# Altium PCB mainboard.PcbDoc
Units mm, origin at the board's own origin, x right, y up, seen from the top; angles counter-clockwise.
Board outline 85 x 57 mm, 2 copper layers (Top Layer, Bottom Layer); 57 components, 35 nets, 167 pads, 83 vias.
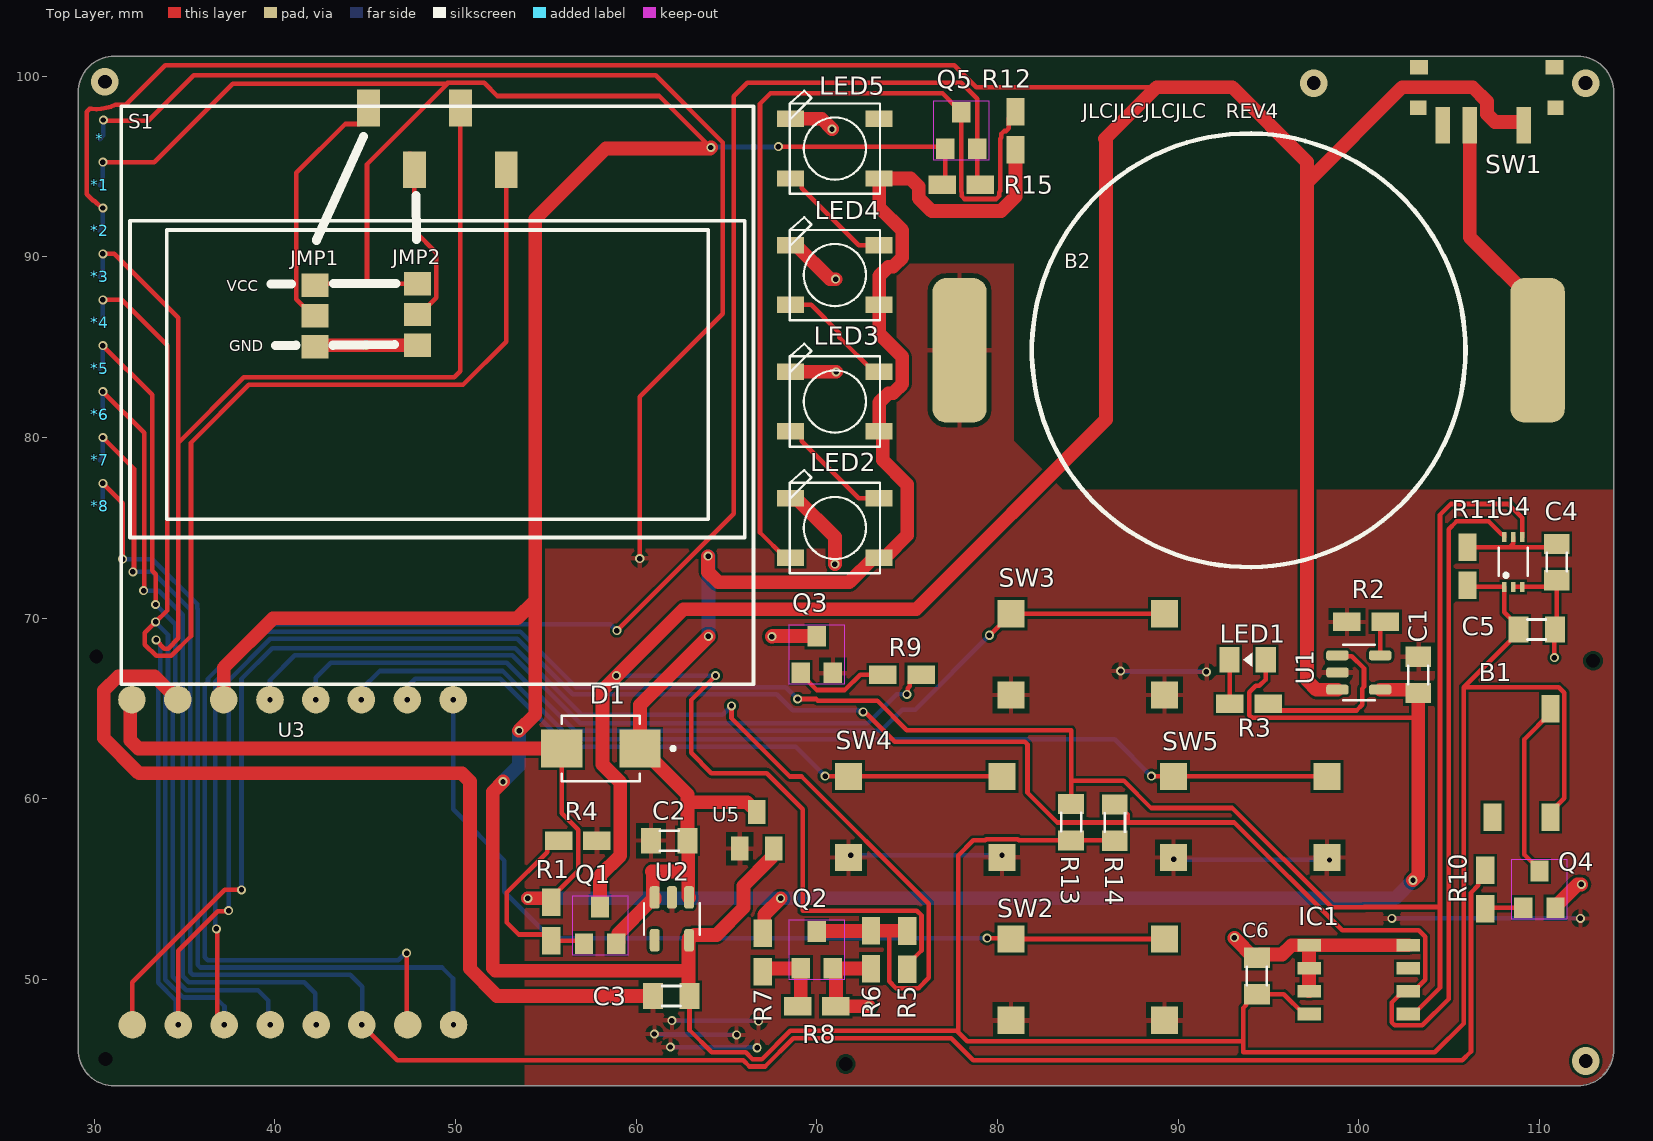
[diagram p0: Top Layer view]
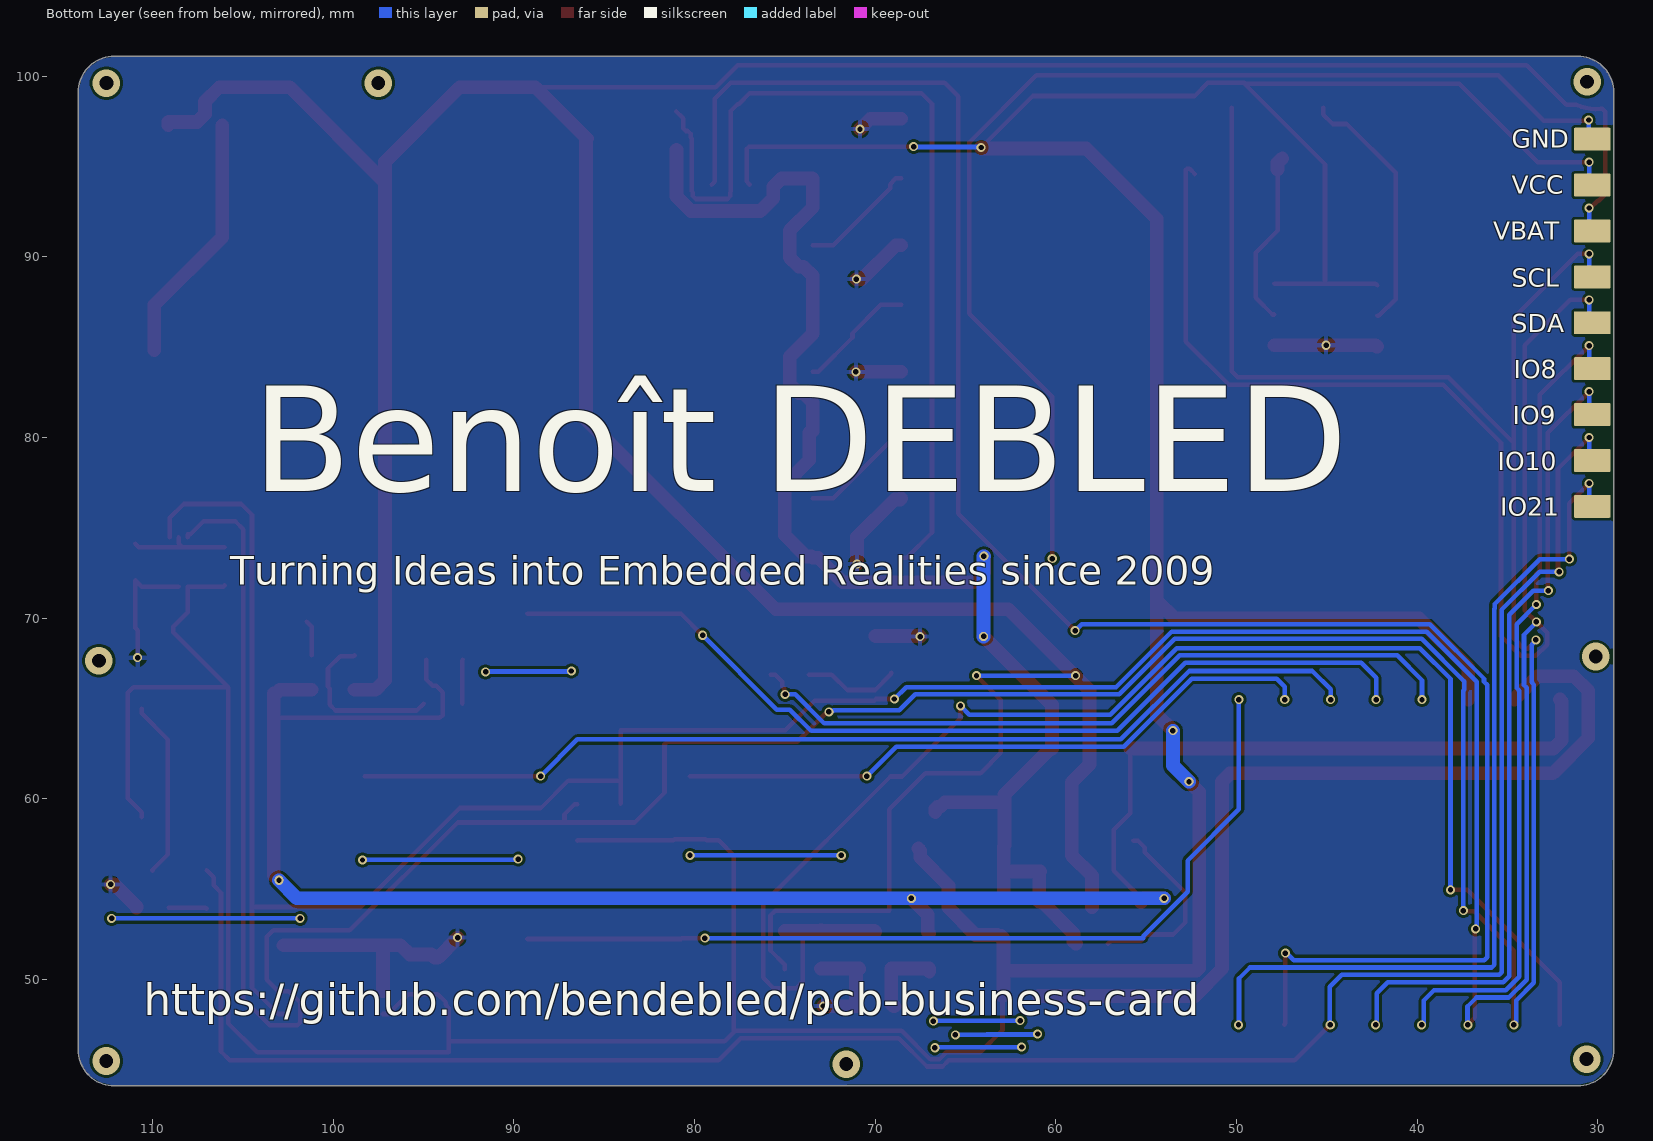
[diagram p1: Bottom Layer view, seen from below]

## Layer stack, top to bottom
Top Solder: solder mask 0.0102, Solder Resist, Dk 3.5
Top Layer: signal copper 0.0356
Dielectric 1: dielectric 0.32, FR-4, Dk 4.8
Bottom Layer: signal copper 0.0356
Bottom Solder: solder mask 0.0102, Solder Resist, Dk 3.5

## Board outline
29.114,46.114 29.114,99.114 cw(c31.114,99.114) 31.114,101.114 112.114,101.114 cw(c112.114,99.114) 114.114,99.114 114.114,46.114 cw(c112.114,46.114) 112.114,44.114 31.114,44.114 cw(c31.114,46.114)

## Design rules (kind name [scope] priority, off if disabled: settings)
Clearance [All] p1: gap=0.152 ignorepadtopadclearanceinfootprint=TRUE except(0.254: Arc-Via Arc-Text Track-Via Track-Text SMDPad-Via SMDPad-Text THPad-THPad THPad-Via THPad-Text Via-Via Via-Text Fill-Text Poly-Text Region-Text Text-Text)
ComponentClearance [All] p1 off: gap=0.254 collisioncheckmode=3 verticalgap=0.254 showdistances=FALSE
HoleSize [All] p1: absolutevalues=TRUE maxlimit=2.54 minlimit=0.3 maxpercent=80.000 minpercent=20.000
MinimumSolderMaskSliver [All] p1: minsoldermaskwidth=0.038
PolygonConnect [All] p1: connectstyle=Relief reliefconductorwidth=0.254 reliefentries=4 polygonreliefangle="90 Angle" airgapwidth=0.254
RoutingVias [All] p1: holewidth=0.3 width=0.5 viastyle="Through Hole" minholewidth=0.3 minwidth=0.5 maxholewidth=0.3 maxwidth=0.5
SilkToSilkClearance [All] p1 off: silktosilkclearance=0.254
SilkToSolderMaskClearance [IsPad] p1 off: minsilkscreentomaskgap=0.254 clearancetoexposedcopper=TRUE
SolderMaskExpansion [All] p1: expansion=0.102 istentingtop=FALSE
Width [All] p1: maxlimit=0.762 minlimit=0.254 preferedwidth=0.254
25 further rules are at their usual default settings.

## Components (designator, comment, footprint, x,y, rotation, side; value= is the part's Value field where it differs from the comment)
* "PAD 1" PAD_50mil_x_80mil 30.48,96.52 r180 top
*1 "PAD 1" PAD_50mil_x_80mil 30.48,93.98 r180 top
*2 "PAD 1" PAD_50mil_x_80mil 30.48,91.44 r180 top
*3 "PAD 1" PAD_50mil_x_80mil 30.48,88.9 r180 top
*4 "PAD 1" PAD_50mil_x_80mil 30.48,86.36 r180 top
*5 "PAD 1" PAD_50mil_x_80mil 30.48,83.82 r180 top
*6 "PAD 1" PAD_50mil_x_80mil 30.48,81.28 r180 top
*7 "PAD 1" PAD_50mil_x_80mil 30.48,78.74 r180 top
*8 "PAD 1" PAD_50mil_x_80mil 30.48,76.2 r180 top
B1 "Buzzer5x5x2" BUZZER_5x5x2 109,62 r0 top
B2 "LIR2450" LIR2450 93.904,84.836 r180 top
C1 "1uF" C0805K 103.296,66.857 r90 top
C2 "10uF" C0805K 61.833,57.695 r180 top
C3 "10uF" C0805K 61.951,49.098 r180 top
C4 "100nF" C0805K 110.95,73.119 r270 top
C5 "100nF" C0805K 109.846,69.378 r0 top
C6 "1uF" C0805K 94.361,50.19 r90 top
D1 "Diode_M7" DO-214 58.042,62.791 r180 top
IC1 "DS1621_1" SOP-8 100,50 r180 top
JMP1 "0R-JUMPA" A0R-JMP 42.215,86.741 r0 top
JMP2 "0R-JUMPA" A0R-JMP 47.904,86.817 r0 top
LED1 "LED" LED0805K 93.85,67.703 r180 top
LED2 "WS2812B" WS2812B 71,75 r0 top
LED3 "WS2812B" WS2812B 71,82 r0 top
LED4 "WS2812B" WS2812B 71,89 r0 top
LED5 "WS2812B" WS2812B 71,96 r0 top
Q1 "SI2301" SOT-23 58,53 r0 top value=IRLZ44NPBF
Q2 "SI2302" SOT-23 70,51.651 r0 top value=IRLZ44NPBF
Q3 "SI2302" SOT-23 70,68 r0 top value=IRLZ44NPBF
Q4 "SI2302" SOT-23 110,55 r0 top value=IRLZ44NPBF
Q5 "BSS138" SOT-23 78,97 r0 top value=IRLZ44NPBF
R1 "1k" R0805W 55.291,53.212 r90 top
R2 "10k" R0805W 100.392,69.804 r0 top
R3 "470" R0805W 93.918,65.279 r0 top
R4 "100k" R0805W 56.76,57.695 r0 top
R5 "4.7M" R0805W 75.006,51.638 r270 top
R6 "1M" R0805W 73,51.651 r90 top
R7 "1k" R0805W 67,51.5 r90 top
R8 "100k" R0805W 70.003,48.528 r180 top
R9 "1k" R0805W 74.727,66.878 r180 top
R10 "1k" R0805W 107,55 r270 top
R11 "1k" R0805W 106.016,72.884 r270 top
R12 "10k" R0805W 81,97 r270 top
R13 "4.7k" R0805K 84.074,58.725 r270 top
R14 "4.7k" R0805K 86.493,58.699 r270 top
R15 "10k" R0805W 78,94 r180 top
S1 "1.3\" OLED NO_HOLES_SMD" 1.3_NO-holes_SMD 48.997,82.347 r0 top
SW1 "MSK-12C02" MSK-12C02 107.086,99.39 r180 top
SW2 "10-XX-6MD" BT6X6 85,50 r180 top
SW3 "10-XX-6MD" BT6X6 85,68 r180 top
SW4 "10-XX-6MD" BT6X6 76,59 r180 top
SW5 "10-XX-6MD" BT6X6 94,59 r180 top
U1 "LTC4054" SOT23-5 100,67 r0 top
U2 "HT7833" SOT23-5 61.976,53.365 r270 top
U3 "ESP32C3" ESP32-C3-module 41,56.5 r90 top
U4 "BH1750" XDCR_BH1750FVI-TR 108.55,73.119 r90 top
U5 "Alternate LDO (SOT23)" SOT95P237X112-3N 66.675,58.268 r0 top

## Footprints (in the part's own frame and the unit in brackets; to place one, negate y for a bottom-side part, rotate by r counter-clockwise, add the part's x,y. Pads: shape width x height; smd on the part's side, far side on the other; paste and mask are expansions set on the pad)
1.3_NO-holes_SMD [mil]
  rect 50x80 / inner round 60 / far side round 0 all layers, no hole: 0(-150,626.21) 1(-50,491.22) 2(50,626.21) 3(150,491.22)
  silkscreen extent -689,-630 689,630
A0R-JMP [mm]
  rect 1.5x1.3 smd: 1(0,1.7) 2(0,0) 3(0,-1.7)
BT6X6 [mm]
  rect 1.5x1.5 smd: P(-4.25,2.25) P1(4.25,2.25) S(-4.25,-2.25) S1(4.25,-2.25)
BUZZER_5x5x2 [mm]
  rect 1x1.524 / inner round 1.524 / far side round 0 all layers, no hole: +(1.6,-3) -(1.6,3) NC(-1.6,-3)
C0805K [mil]
  rect 44x56 smd: 1(-39.37,0) 2(40,0)
  silkscreen extent -20,-22 20,22
DO-214 [mm]
  rect 2.28x2.12 smd: A(2.165,0) C(-2.165,0)
  silkscreen extent -4.1,-1.81 2.16,1.81
ESP32-C3-module [mil]
  round 60 / inner round 60 / far side round 0 all layers, no hole: 1(354.33,350.88) 2(354.33,250.88) 3(354.33,150.88) 4(354.33,50) 5(354.33,-50) 6(354.33,-149.12) 7(354.33,-249.12) 8(354.33,-349.12) 9(-354.33,350) 10(-354.33,250) 11(-354.33,150) 12(-354.33,49.12) 13(-354.33,-50.88) 14(-354.33,-150) 15(-354.33,-250) 16(-354.33,-350)
LED0805K [mil]
  rect 44x56 smd: 1(-39.37,0) 2(40,0)
  silkscreen extent -10,-15 10,15
LIR2450 [mm]
  rrect50% 3x8 / inner rrect50% 3x8 / far side rrect50% 0x0 all layers, no hole: 1(-16,0) 2(16,0)
  silkscreen extent -12,-12 12,12
MSK-12C02 [mil]
  rect 31.5x78.74 smd: COM(37.4,82.68) L1(96.46,82.68) L2(-80.71,82.68)
  rect 39.37x31.5 smd: GND@1(-147.64,-44.29) GND@4(147.64,-44.29)
  rect 35.43x31.5 smd: GND@2(-149.61,44.29) GND@3(149.61,44.29)
PAD_50mil_x_80mil [mil]
  rrect10% 0x0 / inner rrect50% 60x60 / far side rrect10% 80x50 all layers, no hole mask+4: 1(7,0)
R0805K [mil]
  rect 44x56 smd: 1(-39.37,0) 2(40,0)
  silkscreen extent -20,-22 20,22
R0805W [mil]
  rect 60x40 smd: 1(-41.44,0) 2(42,0)
SOP-8 [mm]
  rect 1.3x0.7 smd: 1(-2.75,1.905) 2(-2.75,0.635) 3(-2.75,-0.635) 4(-2.75,-1.905) 5(2.75,-1.905) 6(2.75,-0.635) 7(2.75,0.635) 8(2.75,1.905)
SOT23-5 [mm]
  rrect50% 1.24x0.55 smd: 1(-1.185,0.95) 2(-1.185,0) 3(-1.185,-0.95) 4(1.185,-0.95) 5(1.185,0.95)
  silkscreen extent -0.88,-1.54 0.88,1.54
SOT95P237X112-3N [mil]
  rect 39x52 smd: 1(-37,-40) 2(37,-40) 3(0,40)
SOT-23 [mil]
  rect 40x45 smd: 1(-35,-40) 2(35,-40) 3(0,40)
  Top Layer keep-out region: -60,-65 -60,65 60,65 60,-65
WS2812B [mm]
  rect 1.5x0.9 smd: 1-VDD(2.45,-1.65) 2-DOUT(2.45,1.65) 3-GND(-2.45,1.65) 4-DIN(-2.45,-1.65)
  silkscreen extent -2.5,-2.5 2.5,3.2
XDCR_BH1750FVI-TR [mm]
  rect 0.55x0.25 smd: 1(-1.375,0.5) 2(-1.375,0) 3(-1.375,-0.5) 4(1.375,-0.5) 5(1.375,0) 6(1.375,0.5)
  silkscreen extent -0.84,-0.8 0.78,0.8, body extent -1.5,-0.8 1.5,0.8, height 0.75

## Part data
C1 C2 C3 C4 C5 C6: library part C-USC0805K
IC1: Package=SOP-8, DeviceSetName=TP4056, GateName_1=G$1, LibraryName=bd-component, SymbolName_1=TP4056
JMP1 JMP2: Package=A0R-JMP, DeviceName=A, DeviceSetName=0R-JUMP, GateName_1=-0R, GateName_2=G$2, LibraryName=bd-misc, SymbolName_1=0RJM, SymbolName_2=JMP
LED2 LED3 LED4 LED5: "Raspberry Pi HAT _40 pin_ Wheeled Robotics Kit", Package=None, Availability=Unavailable, MF="SparkFun Electronics", MP=WS2812B, Price=None, SnapEDA_Link=https://www.snapeda.com/parts/WS2812B/Worldsemi/view-part/1038297/?ref=snap
Q1 Q2 Q3 Q4: Manufacturer_Part_Number=IRLZ44NPBF, Built_By=EMA_UL_Team, C="Copyright (C) 2018 Accelerated Designs. All rights reserved", Copyright="Copyright (C) 2018 Accelerated Designs. All rights reserved", Vendor=Infineon
Q5: library part SI2302, Manufacturer_Part_Number=IRLZ44NPBF, Built_By=EMA_UL_Team, C="Copyright (C) 2018 Accelerated Designs. All rights reserved", Copyright="Copyright (C) 2018 Accelerated Designs. All rights reserved", Vendor=Infineon
R1 R2 R3 R4 R5 R6 R7 R8 R9 R10 R11 R12 R15: library part R-US_R0805W
R13 R14: library part R-US_R0805
SW2 SW3 SW4 SW5: Package=BT4.5X4.5, DeviceName=-4.5SMD, DeviceSetName=10-XX, GateName_1=1, LibraryName=bd-switch, SymbolName_1=TS2
U1: "Battery Charger Li-Ion 10mA to 150mA 4.2V 5-Pin TSOT-23 T/R", Package="SOT-23-5 Analog Devices", Digi-Key_Part_Number=LTC4054LES5-4.2#TRPBFCT-ND, Digi-Key_Purchase_URL=https://www.digikey.com/product-detail/en/linear-technology-analog-devices/LTC4054LES5-4.2-TRPBF/LTC4054LES5-4.2-TRPBFCT-ND/1888452?utm_source=snapeda&utm_medium=aggregator&utm_campaign=symbol, MF="Analog Devices", MP=LTC4054LES5-4.2#TRPBF, SnapEDA_Link=https://www.snapeda.com/parts/LTC4054LES5-4.2%23TRPBF/Analog%20Devices/view-part/4339236/?ref=snap
U2: library part HT7833-MIC5216, "LDO Regulator", Package="SOT-23-5 Analog Devices", Digi-Key_Part_Number=LTC4054LES5-4.2#TRPBFCT-ND, Digi-Key_Purchase_URL=https://www.digikey.com/product-detail/en/linear-technology-analog-devices/LTC4054LES5-4.2-TRPBF/LTC4054LES5-4.2-TRPBFCT-ND/1888452?utm_source=snapeda&utm_medium=aggregator&utm_campaign=symbol, MF="Analog Devices", MP=LTC4054LES5-4.2#TRPBF, SnapEDA_Link=https://www.snapeda.com/parts/LTC4054LES5-4.2%23TRPBF/Analog%20Devices/view-part/4339236/?ref=snap
U4: "Optical Sensor Ambient 560nm IÂ²C 6-SMD, Flat Lead Exposed Pad", Package="SMD-6 ROHM Semiconductor", Availability="In Stock", Check_prices=https://www.snapeda.com/parts/BH1750FVI-TR/Rohm/view-part/?ref=eda, MF=Rohm, MP=BH1750FVI-TR, Price=None, Purchase-URL=https://pricing.snapeda.com/search/part/BH1750FVI-TR/?ref=eda, SnapEDA_Link=https://www.snapeda.com/parts/BH1750FVI-TR/Rohm/view-part/?ref=snap
U5: library part MCP1700T-3302E/TT, Package=SOT95P237X112-3N, DeviceSetName=MCP1700T-3302E/TT, GateName_1=A, LibraryName=bd-component, MPN=MCP1700T-3302E/TT, OC_FARNELL=1296592, OC_NEWARK=88H9817, SUPPLIER=Microchip, SymbolName_1=MCP1700T-3302E/TT
SW1: DeviceSetName=MSK-12C02, GateName_1=MSK-12C02, LibraryName=bd-switch, Package=MSK-12C02, SymbolName_1=SPDT_SWITCH

## Via types
v1: diameter 0.5, hole 0.3, Top Layer to Bottom Layer, tented both sides, 75 vias
v2: diameter 1.524, hole 0.762, Top Layer to Bottom Layer, 4 vias
v3: diameter 0/1.524 (per signal layer), hole 0.762, Top Layer to Bottom Layer, 4 vias

## Nets (pads, with @x,y where several pads share a name; then routed paths per layer and width w, separated by ;. In a path a pad name is that pad's centre, name@x,y a point inside that pad or via, vN(x,y) a via of type N, cw(c..) or ccw(c..) an arc to the next point about the centre after c; other vN are vias at no path point)
BAT_VOLTAGE: Q2.3 R5.1 R6.2 U3.9 | length 82.1
  Top Layer w0.254: U3.9 32.11,49.86 37.215,54.966 v1(38.151,54.966) ; v1(65.278,65.155) 65.278,64.465 68.498,61.246 69.15,61.246 76.2,54.195 76.2,50.1 75.63,49.53 74.382,49.53 74.003,49.909 74.003,52.704
  Top Layer w0.762: Q2.3 70.025,52.692 72.975,52.692 R6.2 73.013,52.704 74.003,52.704 74.993,52.704 R5.1
  Bottom Layer w0.254: v1(38.151,54.966) 38.151,66.65 39.853,68.351 53.315,68.351 56.998,64.668 64.791,64.668 v1(65.278,65.155)
BTN0: SW2.S SW2.S1 U3.8 | length 49.5
  Top Layer w0.254: v1(79.426,52.299) 80.701,52.299 SW2.S1 SW2.S
  Bottom Layer w0.254: v1(49.868,65.5) 49.868,59.428 52.705,56.591 52.705,54.861 55.166,52.4 55.166,52.299 v1(79.426,52.299)
BTN1: SW4.S SW4.S1 U3.7 | length 36
  Top Layer w0.254: v1(70.46,61.265) 71.735,61.265 SW4.S1 SW4.S
  Bottom Layer w0.254: v1(47.328,65.5) 47.328,66.205 47.772,66.65 52.477,66.65 56.236,62.89 68.834,62.89 v1(70.46,61.265)
BTN2: SW5.S SW5.S1 U3.6 | length 56.9
  Top Layer w0.254: v1(88.519,61.265) 89.735,61.265 SW5.S1 SW5.S
  Bottom Layer w0.254: v1(44.788,65.5) 44.788,66.073 45.796,67.081 52.62,67.081 56.405,63.297 86.487,63.297 v1(88.519,61.265)
BTN3: SW3.S SW3.S1 U3.5 | length 52.8
  Top Layer w0.254: v1(79.553,69.063) 79.563,69.063 SW3.S1 SW3.S
  Bottom Layer w0.254: v1(42.27,65.5) 42.27,66.705 43.104,67.539 52.837,67.539 56.597,63.779 73.549,63.779 74.717,64.948 75.448,64.948 79.553,69.053 v1(79.553,69.063)
BUZZER: *7.1 R10.1 U3.14 | length 119.7
  Top Layer w0.254: v1(30.48,80.01) 32.203,78.287 32.203,72.703 32.135,72.634 v1(32.135,72.568) ; v1(44.81,47.5) 46.768,45.542 65.919,45.542 66.271,45.191 67.13,45.191 68.701,46.761 77.432,46.761 78.651,45.542 105.734,45.542 106.213,46.021 106.213,54.811 106.619,55.217 106.619,55.671 R10.1
  Bottom Layer w0.254: *7.1 30.48,78.918 v1(30.48,80.01) ; v1(32.135,72.568) 33.223,72.568 35.306,70.485 35.306,70.374 35.314,70.366 35.314,50.415 35.462,50.267 44.171,50.267 44.831,49.606 44.831,47.521 v1(44.81,47.5)
COMPONENTS_ON_OFF: R9.1 U3.4 | length 40.7
  Top Layer w0.254: v1(74.981,65.786) 75.028,65.833 75.028,66.127 75.144,66.243 75.144,66.497 75.525,66.878 R9.1
  Bottom Layer w0.254: v1(39.73,65.5) 39.73,66.578 41.097,67.945 53.137,67.945 56.896,64.186 72.829,64.186 74.429,65.786 v1(74.981,65.786)
GND: *.1 B2.2 C1.2 C2.2 C3.2 Q3.2 R2.1 R4.2 SW2.P SW2.P1 SW3.P SW3.P1 SW4.P SW4.P1 SW5.P SW5.P1 U1.2 U2.2 U3.2 U5.1 | length 159.7
  Top Layer w0.254: v1(30.506,97.585) 30.552,97.54 32.999,97.54 35.509,100.051 61.081,100.051 64.795,96.336 64.795,86.86 60.196,82.261 60.196,73.306 v1(60.198,73.304) ; SW4.P1 v1(71.877,56.877) ; SW5.P1 89.75,56.681 v1(89.764,56.667) ; v1@101.829,53.34 v1(101.829,53.391)
  Top Layer w0.762: U3.2 33.332,66.795 31.328,66.795 30.531,65.998 30.531,63.373 32.487,61.417 50.354,61.417 50.8,60.971 50.8,50.6 52.302,49.098 C3.2
  Bottom Layer w0.254: *.1 30.506,96.724 v1(30.506,97.585) ; v1(61.011,46.99) 61.036,46.965 63.818,46.965 63.843,46.939 v1(65.557,46.939) ; v1(61.891,46.27) 61.912,46.249 66.679,46.249 v1(66.7,46.228) ; v1(61.976,47.727) 61.989,47.714 66.764,47.714 v1(66.777,47.701) ; v1(71.877,56.877) v1(80.25,56.877) ; v1(86.817,67.081) 86.843,67.056 91.542,67.056 v1(91.567,67.031) ; v1(89.764,56.667) 89.786,56.645 98.355,56.645 v1(98.377,56.623) ; v1(101.829,53.391) v1(112.268,53.391)
GND_ON_OFF: C4.2 C5.2 C6.2 IC1.4 IC1.5 IC1.6 IC1.7 JMP1.3 JMP2.3 LED2.3-GND LED3.3-GND LED4.3-GND LED5.3-GND Q2.2 Q3.3 Q4.2 R6.1 R8.1 U4.2 U4.3 | length 49.3
  Top Layer w0.254: U4.2 U4.3 110.591,71.744 C4.2 110.95,69.466 C5.2 110.82,69.336 v1(110.82,67.818)
  Top Layer w0.762: JMP1.3 42.289,85.115 v1(45.034,85.115) 47.903,85.115 JMP2.3 ; v1(67.513,68.986) 67.543,69.016 Q3.3 ; LED2.3-GND 68.619,76.581 68.919,76.581 71,74.5 v1(71,73) ; LED3.3-GND 71.061,83.65 v1(71.069,83.642) ; LED4.3-GND 68.85,90.65 70.727,88.773 v1(71.044,88.773) ; LED5.3-GND 70.269,97.65 v1(70.841,97.079) ; v1(72.873,48.539) 72.862,48.528 R8.1 71.055,50.405 70.889,50.571 Q2.2 70.907,50.616 72.982,50.616 R6.1 ; v1(93.116,52.324) 93.116,52.299 94.209,51.206 C6.2 94.539,51.384 95.758,51.384 96.279,51.905 IC1.5 ; IC1.7 IC1.6 IC1.5 ; IC1.4 IC1.5 ; Q4.2 110.889,54.047 112.112,55.27 v1(112.319,55.27)
IO8: *5.1 U3.12 | length 45.2
  Top Layer w0.254: v1(30.48,85.09) 33.202,82.368 33.202,72.64 33.405,72.437 v1(33.405,70.764)
  Bottom Layer w0.254: *5.1 30.48,83.998 v1(30.48,85.09) ; v1(33.405,70.764) 34.493,69.676 34.493,66.142 34.348,65.997 34.348,50.164 35.093,49.419 36.881,49.419 36.897,49.403 39.065,49.403 39.624,48.844 39.624,47.628 v1(39.752,47.5)
IO9: *6.1 U3.13 | length 45.5
  Top Layer w0.254: v1(30.48,82.55) 32.766,80.264 32.766,71.558 v1(32.741,71.532)
  Bottom Layer w0.254: *6.1 30.48,81.458 v1(30.48,82.55) ; v1(32.741,71.532) 33.573,71.532 34.907,70.198 34.907,50.18 35.228,49.859 41.632,49.859 42.24,49.251 42.24,47.552 v1(42.292,47.5)
IO21: *8.1 U3.16 | length 48.2
  Top Layer w0.254: v1(30.48,77.47) 31.572,76.378 v1(31.572,73.279)
  Bottom Layer w0.254: *8.1 30.48,76.378 v1(30.48,77.47) ; v1(31.572,73.279) 33.223,73.279 35.712,70.79 35.712,70.542 35.72,70.535 35.72,50.822 35.869,50.673 49.251,50.673 49.86,50.063 49.86,47.53 v1(49.89,47.5)
NetB1_-: B1.- Q4.3 | length 9.9
  Top Layer w0.254: Q4.3 110,56.079 109.169,56.91 109.169,63.307 110.6,64.738 B1.-
NetB2_1: B2.1 SW1.COM | length 14
  Top Layer w0.762: SW1.COM 106.136,91.103 109.904,87.336 B2.1
NetC4_1: C4.1 R11.1 U4.5 | length 5.6
  Top Layer w0.254: R11.1 108.354,73.937 ; U4.5 108.548,74.492 108.548,74.131 108.354,73.937 ; C4.1 110.768,73.937 108.354,73.937
NetLED1_2: LED1.2 R3.1 | length 2.4
  Top Layer w0.254: LED1.2 92.866,67.671 R3.1
NetLED2_2-DOUT: LED2.2-DOUT LED3.4-DIN | length 6.6
  Top Layer w0.254: LED3.4-DIN 68.85,80.35 69.173,80.027 69.173,79.796 72.319,76.65 LED2.2-DOUT
NetLED2_4-DIN: LED2.4-DIN Q5.3 R12.1 | length 49.8
  Top Layer w0.254: LED2.4-DIN 68.25,73.35 66.853,74.747 66.853,98.476 67.437,99.06 76.956,99.06 77.555,98.46 77.619,98.46 78,98.079 Q5.3 78,93.603 78.011,93.592 78.011,93.376 78.175,93.213 79.93,93.213 80.094,93.376 80.094,93.592 80.153,93.651 80.153,96.536 80.213,96.595 80.213,96.811 80.376,96.975 80.48,96.975 80.628,97.123 80.628,97.681 R12.1
NetLED3_2-DOUT: LED3.2-DOUT LED4.4-DIN | length 6.6
  Top Layer w0.254: LED4.4-DIN 69.681,87.35 71.254,85.777 71.254,85.546 73.15,83.65 LED3.2-DOUT
NetLED4_2-DOUT: LED4.2-DOUT LED5.4-DIN | length 6.6
  Top Layer w0.254: LED5.4-DIN 68.85,94.35 69.173,94.027 69.173,93.796 72.319,90.65 LED4.2-DOUT
NetQ1_1: Q1.1 R1.1 R4.1 | length 10.6
  Top Layer w0.254: R4.1 55.453,57.695 55.072,57.314 55.072,57.06 52.837,54.824 52.837,53.163 53.5,52.5 54.951,52.5 R1.1 56.936,52.159 Q1.1
NetQ2_1: Q2.1 R7.1 R8.2 | length 4.5
  Top Layer w0.762: R7.1 67,50.616 68.984,50.616 69.002,50.635 Q2.1 69.111,48.655 68.984,48.528 R8.2
NetQ3_1: Q3.1 R9.2 | length 5.3
  Top Layer w0.254: Q3.1 69.111,66.921 70,66.032 71.555,66.032 72.402,66.878 R9.2
NetQ4_1: Q4.1 R10.2 | length 2.1
  Top Layer w0.254: R10.2 107.051,53.984 Q4.1
NetR2_2: R2.2 U1.5 | length 2
  Top Layer w0.254: U1.5 101.185,69.531 R2.2
NetR3_2: R3.2 U1.1 | length 9.3
  Top Layer w0.254: R3.2 95.366,64.898 99.874,64.898 100.188,65.212 100.188,65.423 100.18,65.431 100.18,66.112 100.286,66.218 100.286,67.227 99.612,67.901 98.864,67.901 U1.1
OLED_GND: JMP2.2 S1.1 | length 9.7
  Top Layer w0.254: S1.1 47.727,91.444 48.934,90.237 48.934,87.747 48.004,86.817 JMP2.2
  Top Layer w0.762: S1.1@47.473,95.459 47.727,95.205 S1.1
OLED_VCC: JMP1.2 S1.0 | length 14.1
  Top Layer w0.254: JMP1.2 42.115,86.741 41.185,87.67 41.185,94.658 43.891,97.363 44.679,97.363 45.187,97.871 S1.0
SCL: *3.1 IC1.2 R14.1 S1.2 U3.10 U4.6 | length 217.1
  Top Layer w0.254: v1(30.48,90.17) 31.115,90.17 34.65,86.635 34.65,79.701 ; v1(33.426,68.809) 33.426,68.777 33.878,68.325 34.089,68.325 34.65,68.886 34.65,79.701 ; v1(34.65,47.5) 34.65,51.592 36.834,53.776 37.393,53.776 v1(37.44,53.823) ; S1.2 50.267,83.668 49.932,83.333 38.282,83.333 34.65,79.701 ; v1(72.568,64.817) 72.634,64.817 72.732,64.719 72.771,64.719 74.32,63.17 81.512,63.17 81.661,63.021 81.661,60.35 83.312,58.699 87.198,58.699 ; R14.1 86.645,59.699 87.198,59.146 87.198,58.699 ; U4.6 108.05,74.64 108.048,74.642 107.902,74.642 107.182,75.362 105.41,75.362 104.978,74.93 104.978,48.928 103.516,47.466 101.984,47.466 101.821,47.629 101.821,48.736 102.45,49.365 IC1.2 103.05,49.365 103.679,49.994 103.679,52.371 103.32,52.73 99.085,52.73 93.116,58.699 87.198,58.699
  Bottom Layer w0.254: *3.1 30.48,89.078 v1(30.48,90.17) ; v1(33.426,68.809) 33.426,68.765 33.655,68.537 33.655,66.453 33.536,66.333 33.536,49.827 34.519,48.844 34.519,47.631 v1(34.65,47.5) ; v1(37.44,53.823) 37.447,53.83 37.447,65.997 37.397,66.047 37.397,66.505 39.751,68.859 53.426,68.859 56.499,65.786 67.789,65.786 68.674,64.901 72.31,64.901 72.347,64.864 72.521,64.864 v1(72.568,64.817)
SDA: *4.1 IC1.1 R13.1 S1.3 U3.11 U4.4 | length 224.1
  Top Layer w0.254: v1(30.48,87.63) 31.521,87.63 34.036,85.115 34.036,70.434 v1(33.401,69.799) 32.795,69.194 32.795,68.547 33.424,67.918 34.257,67.918 35.357,69.018 35.357,79.718 38.564,82.925 50.413,82.925 52.807,85.319 S1.3 52.737,94.894 52.597,94.894 S1.3@52.299,94.595 ; v1(36.757,52.807) 36.804,52.76 36.804,47.886 v1(37.19,47.5) ; v1(68.936,65.532) 69.959,65.532 70.044,65.448 73.338,65.448 74.981,63.805 84.074,63.805 84.074,61 ; R13.1 84.074,61 ; IC1.1 103.05,48.095 104.496,49.541 104.496,54 104.474,54.022 ; U4.4 109.05,75.557 108.28,76.327 105.08,76.327 104.496,75.743 104.496,54.044 104.474,54.022 ; 84.074,61 87,61 88.5,59.5 93,59.5 98.5,54 100.284,54 100.306,54.022 104.474,54.022
  Bottom Layer w0.254: *4.1 30.48,86.538 v1(30.48,87.63) ; v1(33.401,69.799) 33.401,69.77 34.087,69.085 34.087,66.31 33.942,66.165 33.942,49.996 34.925,49.013 36.712,49.013 37.211,48.514 37.211,47.521 v1(37.19,47.5) ; v1(36.757,52.807) 36.703,52.861 36.703,66.497 39.472,69.266 53.594,69.266 56.667,66.192 68.275,66.192 v1(68.936,65.532)
VBAT: *2.1 Q1.3 R5.2 SW1.L2 U1.3 | length 224
  Top Layer w0.254: 29.665,98.124 29.591,98.05 29.591,93.472 29.947,93.116 30.007,93.116 30.413,92.71 v1(30.48,92.71) ; 29.665,98.124 29.74,98.199 29.845,98.199 29.856,98.199 ccw(c30.085,100.845) 31.18,98.425 31.75,98.425 33.94,100.615 77.608,100.615 78.824,99.398 88.809,99.398 ; v1(64.389,66.823) 63.043,65.477 63.043,62.55 64.16,61.433 67.218,61.433 69.215,59.436 69.215,53.823 75.539,53.823 75.794,53.568 75.794,51.613 75.006,50.825 R5.2
  Top Layer w0.762: Q1.3 58,55.754 59.122,56.876 59.122,60.921 58.141,61.903 58.141,66.015 62.626,70.5 75.5,70.5 86,81 86,96.5 85.955,96.545 88.809,99.398 93,99.398 97.13,95.269 97.13,94.13 ; U1.3 98.805,66.04 97.663,66.04 97.13,66.573 97.13,94.13 ; SW1.L2 109.136,97.449 109.117,97.468 107.543,97.468 107.096,97.914 107.096,98.612 106.31,99.398 102.398,99.398 97.13,94.13
  Bottom Layer w0.254: *2.1 30.48,91.618 v1(30.48,92.71) ; v1(58.903,66.823) v1(64.389,66.823)
VBUS: C1.1 D1.A LED1.1 R1.2 R7.2 U1.4 U3.1 | length 114.6
  Top Layer w0.254: R1.2@55.291,54.373 55.291,54.533 56.785,56.027 56.785,58.299 55.877,59.207 D1.A ; LED1.1 94.85,66.61 94.496,66.257 94.297,66.257 93.944,65.903 93.944,64.641 94.092,64.492 103.288,64.492 103.296,64.5
  Top Layer w0.762: U3.1 32,65.412 32,63.237 32.446,62.791 D1.A ; v1(54,54.5) 55.164,54.5 55.291,54.373 R1.2 ; R7.2 67.086,52.652 67.086,53.586 v1(68,54.5) ; U1.4 102.95,66.05 103.143,65.857 C1.1 103.296,64.5 103.296,55.796 v1(103,55.5)
  Bottom Layer w0.762: v1(54,54.5) 102,54.5 v1(103,55.5)
VCC: *1.1 B1.+ C3.1 C5.1 C6.1 IC1.8 JMP1.1 JMP2.1 Q5.1 R11.2 R13.2 R14.2 R15.2 U2.5 U3.3 U4.1 U5.2 | length 281.8
  Top Layer w0.254: v1(30.48,95.25) 33.325,95.25 37.662,99.587 49.555,99.587 ; JMP1.1 42.291,88.517 45.098,88.517 ; JMP2.1 45.098,88.517 ; C3.1 62.951,47.209 64.186,45.974 66.062,45.974 66.439,45.597 66.962,45.597 68.533,47.168 77.749,47.168 77.8,47.117 ; v1(64.135,96.063) 61.285,98.913 52.313,98.913 51.581,99.644 49.555,99.644 49.555,99.587 ; v1(67.869,96.114) 76.981,96.114 Q5.1 77.111,94.178 R15.2 ; R14.2 86.467,57.709 R13.2 81.186,57.709 81.116,57.779 79.384,57.779 79.314,57.709 78.664,57.709 77.826,56.871 77.826,47.142 77.8,47.117 ; IC1.8 96.95,48.095 95.855,49.19 C6.1 94.209,49.19 93.777,48.759 93.777,48.606 93.599,48.428 93.599,46.584 ; R11.2 106.089,71.744 U4.1 108.05,70.327 108.846,69.531 C5.1 108.846,69.226 105.806,66.186 ; B1.+ 110.6,59.262 111.379,60.041 111.379,65.878 111.071,66.186 105.806,66.186 ; 45.098,88.517 45.098,95.13 49.555,99.587 ; 77.8,47.117 78.334,46.584 93.599,46.584 ; 93.599,46.584 93.599,45.974 104.209,45.974 105.806,47.571 105.806,66.186
  Top Layer w0.762: U3.3 37.168,67.267 39.901,70 53.412,70 54.412,71 ; v1(52.629,60.96) 52.057,60.389 52.057,50.636 52.197,50.497 62.892,50.497 ; v1(53.518,63.779) 54.412,64.674 54.412,71 ; C3.1 62.892,49.157 62.892,50.497 ; v1(64.135,96.063) 64.084,96.012 58.318,96.012 54.412,92.106 54.412,71 ; U5.2 67.501,57.137 67.501,56.755 65.939,55.193 65.939,53.976 64.44,52.476 63.222,52.476 63.165,52.419 63.032,52.419 62.926,52.313 U2.5 62.892,52.146 62.892,50.497
  Bottom Layer w0.254: *1.1 30.48,94.158 v1(30.48,95.25) ; v1(64.135,96.063) 64.16,96.088 67.843,96.088 v1(67.869,96.114)
  Bottom Layer w0.762: v1(52.629,60.96) 53.518,61.849 v1(53.518,63.779)
VSYS: C2.1 D1.C LED2.1-VDD LED3.1-VDD LED4.1-VDD LED5.1-VDD Q1.2 R12.2 U2.1 U2.3 U5.3 | length 80.5
  Top Layer w0.762: Q1.2 59.016,52.111 59.016,52.558 60.769,54.311 60.92,54.311 61.026,54.417 U2.3 ; U2.3@61.017,54.559 60.92,54.656 60.92,55.944 60.883,55.981 62.88,55.981 ; U2.1 62.88,54.597 62.88,55.981 ; v1(63.983,73.437) 63.983,72.561 64.544,72 71.8,72 73.15,73.35 LED2.1-VDD 73.519,73.419 73.819,73.419 75,74.6 75,77.406 73.649,78.757 73.649,80.281 73.58,80.35 LED3.1-VDD 73.45,81.943 73.968,82.461 74.215,82.461 74.733,82.979 74.733,84.474 73.45,85.757 LED4.1-VDD 73.45,88.943 73.968,89.461 74.215,89.461 74.733,89.979 74.733,91.474 73.45,92.757 LED5.1-VDD 75.191,94.35 75.638,93.904 75.638,93.271 76.357,92.552 80.204,92.552 81,93.348 R12.2 ; v1(64,69) 60.207,65.207 D1.C 60.287,62.791 62.833,60.244 62.833,59.817 ; U5.3 66.675,59.449 66.561,59.563 66.396,59.563 66.142,59.817 62.833,59.817 ; 62.833,59.817 C2.1 62.833,57.411 62.88,57.365 62.88,55.981
  Bottom Layer w0.762: v1(63.983,73.437) 64,73.42 v1(64,69)
WS2812B: Q5.2 R15.1 U3.15 | length 106.2
  Top Layer w0.254: v1(47.291,51.464) 47.291,47.559 U3.15 ; v1(58.928,69.317) 65.405,75.794 65.405,98.908 66.142,99.644 78.003,99.644 78.889,98.759 Q5.2 78.889,94.163 R15.1
  Bottom Layer w0.254: v1(47.291,51.464) 47.224,51.464 46.839,51.079 36.275,51.079 36.126,51.228 36.126,66.327 36.297,66.497 36.297,66.666 39.303,69.672 58.572,69.672 v1(58.928,69.317)
pads on no net: B1.NC IC1.3 LED5.2-DOUT SW1.GND@1 SW1.GND@2 SW1.GND@3 SW1.GND@4 SW1.L1 U2.4
copper on no net:
  other v2: 112.556,45.496 97.5,99.625 112.551,99.625 30.595,99.7
  other v3: 71.601,45.328 30.624,45.599 112.968,67.654 30.114,67.886

## Polygon pours and split planes (outlines as drawn)
GND on Top Layer "GND_L01_P000" (solid, pour order 0): 53.823,44.114 112.237,44.114 112.923,44.319 113.522,44.694 113.888,45.284 114.114,45.991 114.114,77.114 83.617,77.114 80.899,79.832 80.899,89.637 75.184,89.637 75.032,89.789 74.422,89.179 74.422,73.838 70.637,73.838 53.823,73.838
GND_ON_OFF on Bottom Layer "GND_ON_OFF_L02_P001" (solid, pour order 1): 30.251,44.374 29.583,44.923 29.21,45.796 29.134,99.187 29.29,99.898 29.713,100.52 30.328,100.936 31.013,101.092 112.141,101.092 112.845,100.936 113.485,100.52 113.921,99.884 114.097,99.136 114.097,46.025 113.921,45.311 113.485,44.69 112.865,44.323 112.192,44.145 30.937,44.196

## Silkscreen, mask and mechanical layers (free items; w line width, h text height)
Top Overlay:
  lines w0.5: 39.776,88.494 40.919,88.494 ; 40.03,85.09 41.173,85.115 ; 42.292,90.904 44.907,96.672 ; 43.205,85.115 46.634,85.166 ; 43.256,88.544 46.711,88.544 ; 47.803,93.396 47.846,90.957
  text "JLCJLCJLCJLC   REV4" at 84.681,97.686 h0.8
  text "VCC" at 37.349,88.108 h0.6
  text "GND" at 37.463,84.783 h0.6
Bottom Overlay:
  text "GND" at 34.773,96.037 h1.02
  text "VCC" at 34.773,93.497 h1.02
  text "VBAT" at 35.789,90.957 h1.02
  text "SCL" at 34.773,88.364 h1.02
  text "SDA" at 34.773,85.824 h1.02
  text "IO8" at 34.646,83.284 h1.02
  text "IO9" at 34.696,80.744 h1.02
  text "IO10" at 35.535,78.204 h1.02
  text "IO21" at 35.408,75.664 h1.02
  text "Benoît DEBLED" at 104.484,75.118 h10
  text "Turning Ideas into Embedded Realities since 2009" at 105.689,71.318 h2.7
  text "https://github.com/bendebled/pcb-business-card" at 110.5,47.439 h3
Mechanical 1:
  lines w0.025: 29.229,46.229 ccw(c31.229,46.229) 31.229,44.229 112,44.229 ccw(c112,46.229) 114,46.229 114,99 ccw(c112,99) 112,101 31.229,101 ccw(c31.229,99) 29.229,99 29.229,46.229
Mechanical 15:
  lines w0.025: 29.212,51.495 30.604,51.485 ; 29.234,61.492 30.595,61.497 ; 105.006,46.399 105,52.5 112,52.5 ; 30.595,46.901 ccw(c31.095,46.901) 31.095,46.401 111.5,46.401 ccw(c111.5,46.901) 112,46.901 112,98.5 ccw(c111.5,98.5) 111.5,99 31.095,99 ccw(c31.095,98.5) 30.595,98.5 30.595,46.901